# Altium PCB TopFinal.PcbDoc
Units mm, origin at the board's own origin, x right, y up, seen from the top; angles counter-clockwise.
Board outline 66.42 x 44.2 mm, 2 copper layers (Top Layer, Bottom Layer); 14 components, 10 nets, 55 pads, 3 vias.
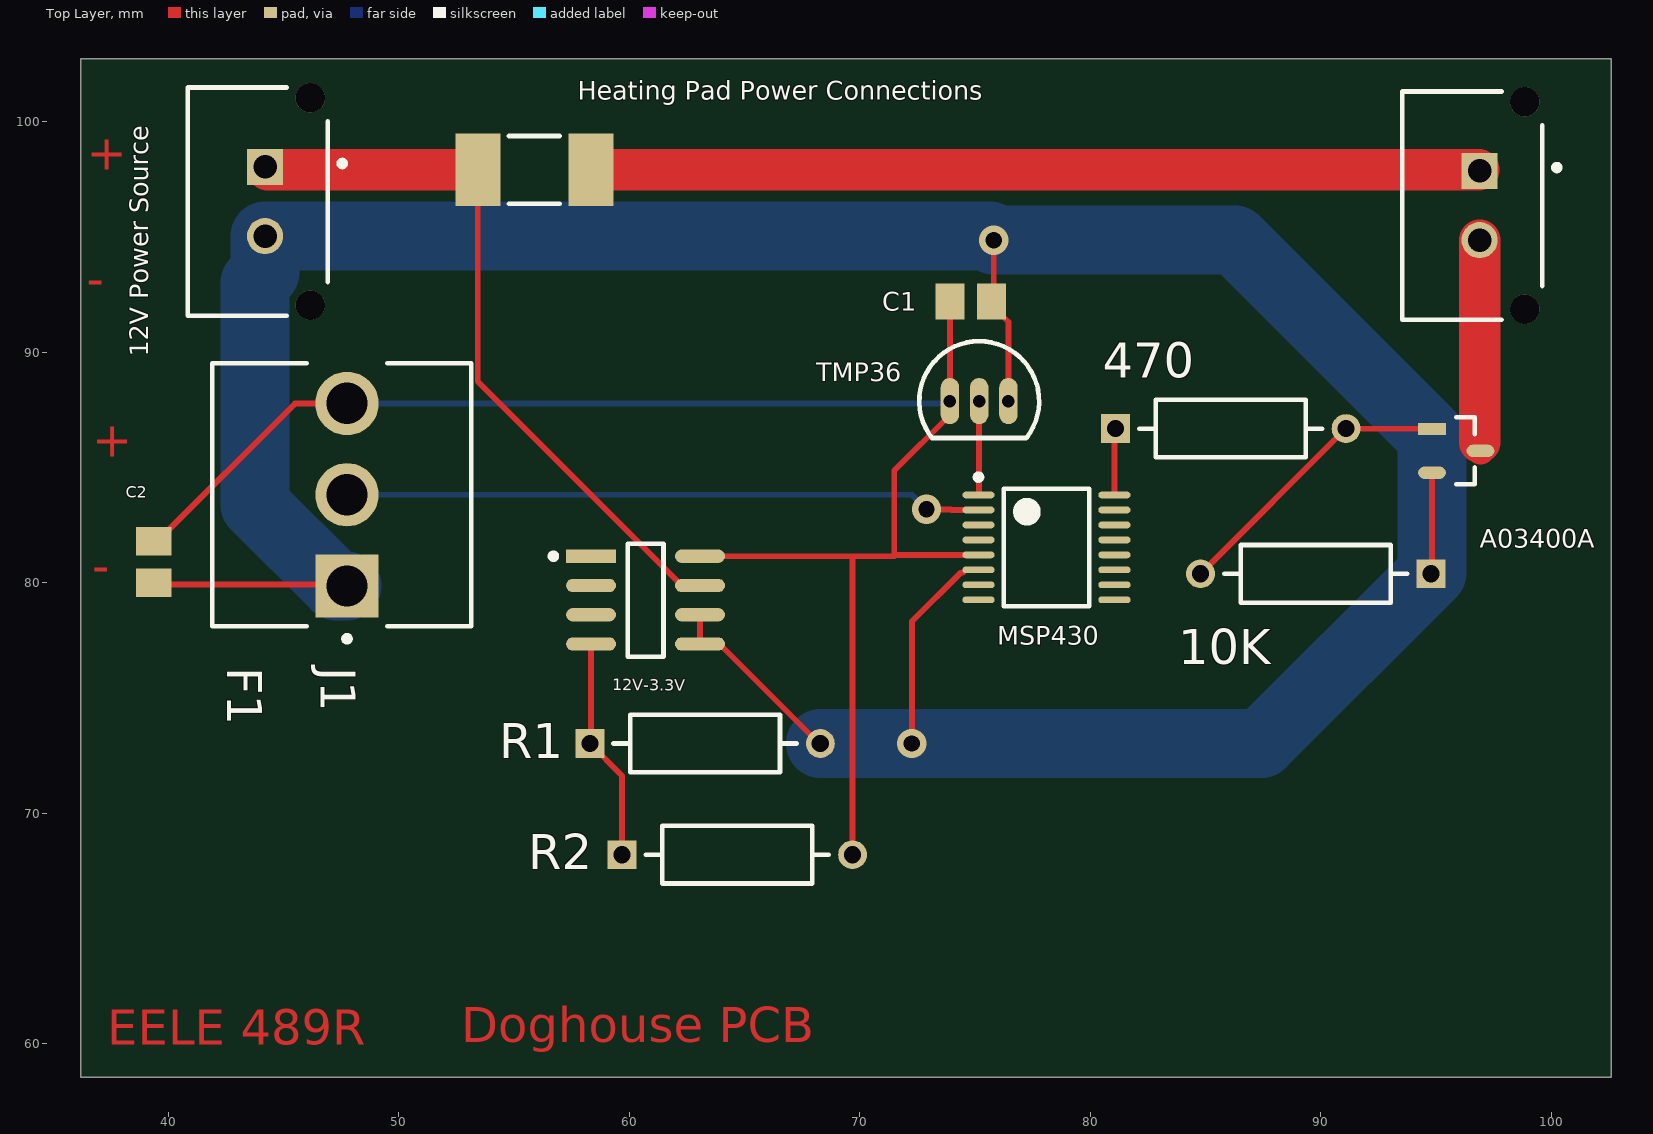
[diagram p0: Top Layer view]
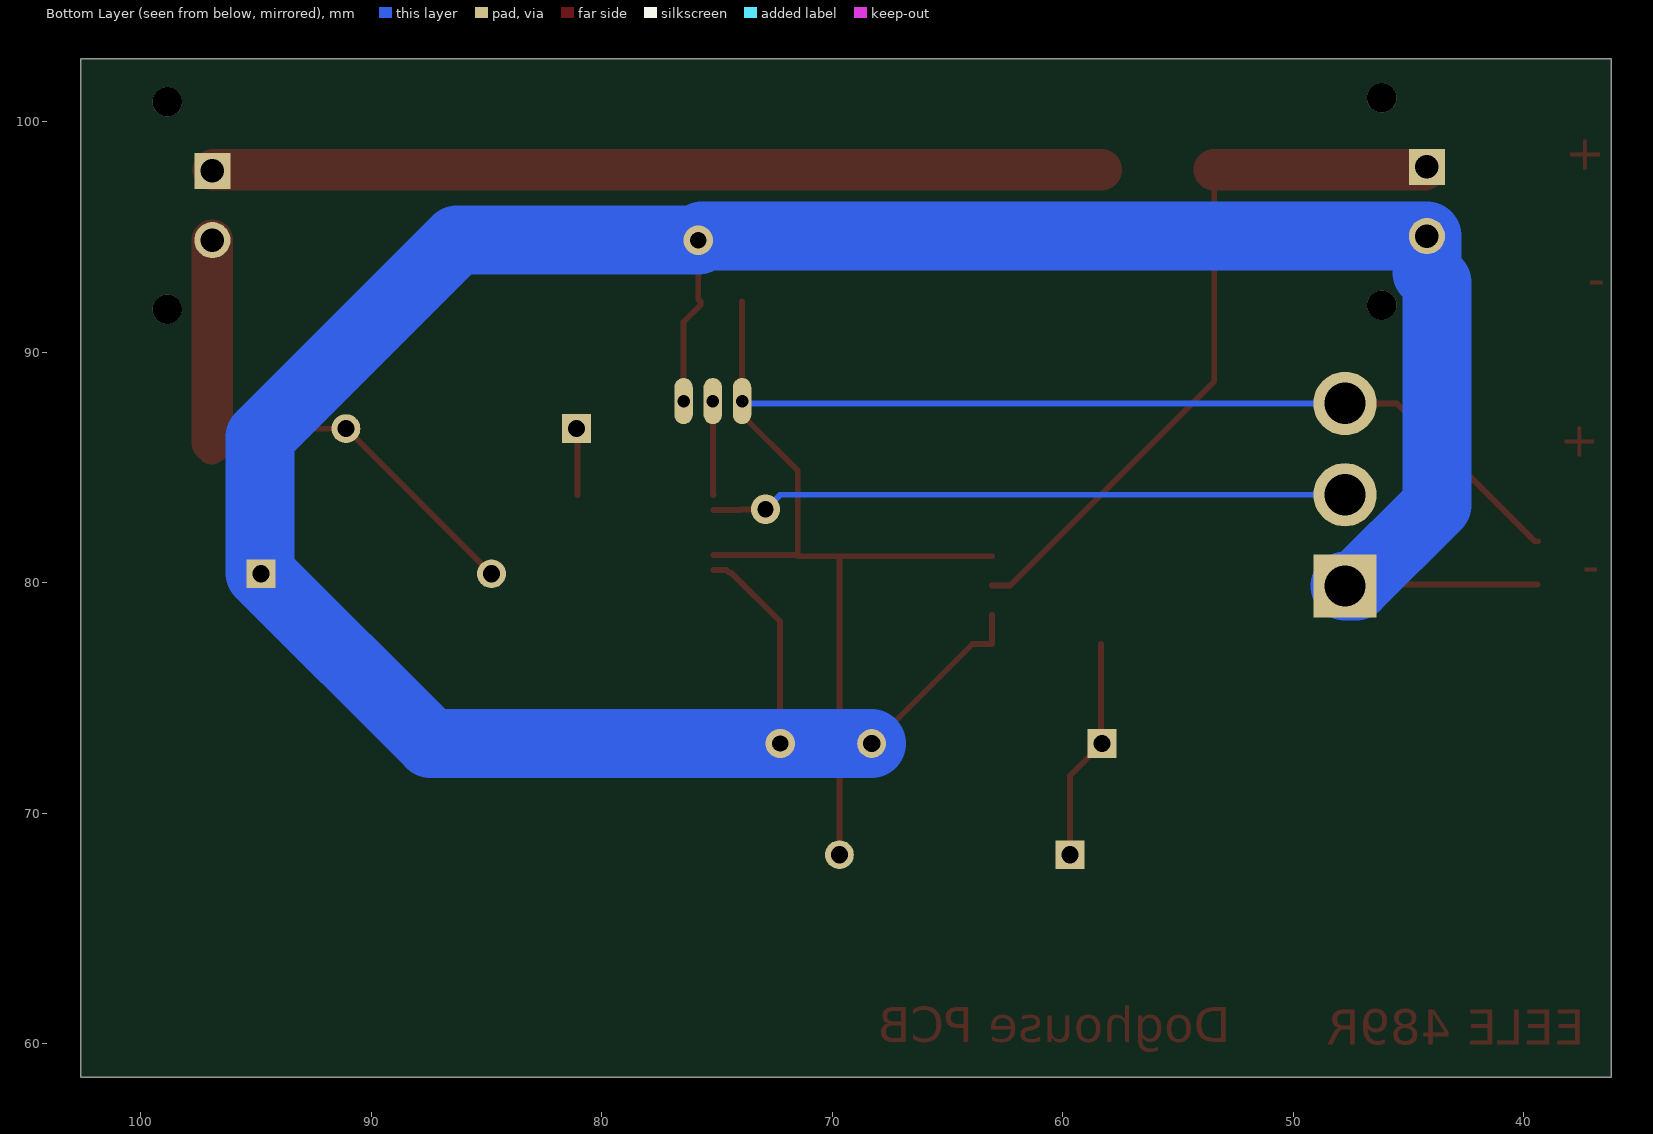
[diagram p1: Bottom Layer view, seen from below]
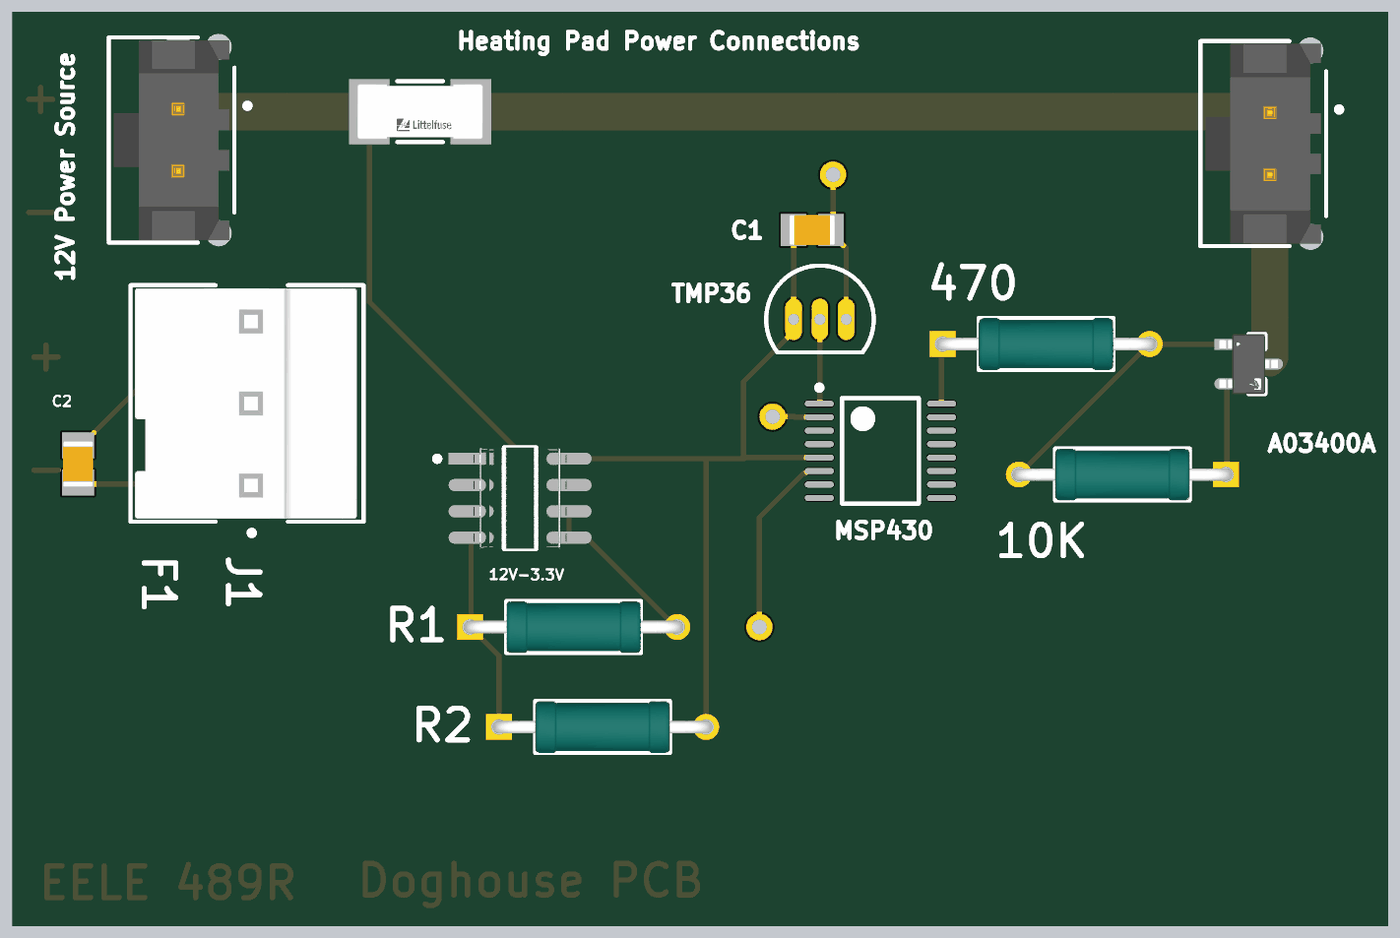
[diagram p2: 3D render of the assembled board from above, using the file's embedded part models]

## Layer stack, top to bottom
Top Solder: solder mask 0.0102, Solder Resist, Dk 3.5
Top Layer: signal copper 0.0356
Dielectric 1: dielectric 0.32, FR-4, Dk 4.8
Bottom Layer: signal copper 0.0356
Bottom Solder: solder mask 0.0102, Solder Resist, Dk 3.5

## Board outline
36.195,58.547 102.616,58.547 102.616,102.743 36.195,102.743

## Design rules (kind name [scope] priority, off if disabled: settings)
Clearance [All] p1: gap=0.254 ignorepadtopadclearanceinfootprint=FALSE
PolygonConnect [All] p1: connectstyle=Relief reliefconductorwidth=0.254 reliefentries=4 polygonreliefangle="90 Angle" airgapwidth=0.254
RoutingVias [All] p1: holewidth=0.711 width=1.27 viastyle="Through Hole" minholewidth=0.711 minwidth=1.27 maxholewidth=0.711 maxwidth=1.27
SolderMaskExpansion [All] p1: expansion=0.102 istentingtop=FALSE
SupplyNets "Schematic Supply Nets" [InNet('GND')] p1: voltage=0.000
Width [All] p1: maxlimit=10 minlimit=0.254 preferedwidth=0.254 minimp=50.000000 maximp=50.000000 favimp=50.000000
30 further rules are at their usual default settings.

## Classes and differential pairs
component class TopFinal: 10K "12V Power Source" 12V-3.3V A03400A C1 C2 F1 "Heating Pad Power Connections" J1 MSP430 TMP36

## Components (designator, comment, footprint, x,y, rotation, side; value= is the part's Value field where it differs from the comment)
10K "MRS25000C1000FRP00" FP-MRS25-MFG 89.789,80.391 r180 top (schematic designator R?)
"12V Power Source" "Molex 43650-0228" FP-436500228-MFG 43.881,96.544 r90 top
12V-3.3V "LM2594MX-3.3/NOPB" FP-D0008A-IPC_B 60.706,79.248 r0 top
470 "MRS25000C1000FRP00" FP-MRS25-MFG 86.104,86.692 r0 top (schematic designator R?)
A03400A "AO3400A" FP-SOT23-IPC_C 95.885,85.725 r0 top
C1 "Capacitor 1 uF +/- 10% 25 V 0805" CAPC2013X145X50ML20T25 74.814,92.202 r0 top value=.1µF
C2 "Capacitor 1 uF +/- 10% 25 V 0805" CAPC2013X145X50ML20T25 39.37,80.899 r270 top value=.1µF
F1 "0452004.MRL" FP-0452-MFG 55.88,97.917 r0 top value=0.0186Ω
"Heating Pad Power Connections" "Molex 43650-0228" FP-436500228-MFG 96.586,96.369 r90 top
J1 "09-65-2038" FP-09-65-2038-MFG 47.527,83.82 r270 top
MSP430 "MSP430FR2310 (Created)" "MSP430FR2310IPW16 (Created Footprint)" 78.105,81.534 r0 top
R1 "MRS25000C1000FRP00" FP-MRS25-MFG 63.293,73.025 r0 top (schematic designator R?)
R2 "MRS25000C1000FRP00" FP-MRS25-MFG 64.69,68.199 r0 top (schematic designator R?)
TMP36 "TMP36(correct)" ADI-T-3 75.184,87.884 r270 top

## Footprints (in the part's own frame and the unit in brackets; to place one, negate y for a bottom-side part, rotate by r counter-clockwise, add the part's x,y. Pads: shape width x height; smd on the part's side, far side on the other; paste and mask are expansions set on the pad)
ADI-T-3 [mm] "TO, Flat Index; 3 In-Line, Axial Leads; Body Dia. 5.1mm; Leads 0.48 x 0.48 mm (max)"
  oval 2x0.8 hole 0.54: 1(0,-1.27) 2(0,0) 3(0,1.27)
  silkscreen extent -2.6,-2.6 1.6,2.6, body extent -2.6,-2.61 1.6,2.61, height 5.33
CAPC2013X145X50ML20T25 [mm] "Chip Capacitor, 2-Leads, Body 2.2x1.45mm, IPC Low Density"
  rect 1.25x1.55 smd: 1(-0.9,0) 2(0.9,0)
  body extent -1.1,-0.72 1.1,0.73, height 1.45
FP-09-65-2038-MFG [mm]
  rect 2.75x2.75 hole 1.8 paste-2539.97 mask+0: 1(3.96,0.225)
  round 2.75 hole 1.8 paste-2539.97 mask+0: 2(0,0.225) 3(-3.96,0.225)
  silkscreen extent -5.71,-5.63 6.37,5.63, body extent -5.81,-5.72 5.81,5.72, height 0.25
FP-0452-MFG [mil]
  rect 77x124 smd paste+0 mask+0: 1(-96.5,0) 2(96.5,0)
  silkscreen extent -43,-58 43,58, body extent -139,-66 139,66, height 10
FP-436500228-MFG [mm]
  rect 1.57x1.57 hole 1.02 paste-2539.97 mask+0: 1(1.5,-0.315)
  round 1.57 hole 1.02 paste-2539.97 mask+0: 2(-1.5,-0.315)
  round 1.27 hole 1.27 unplated paste-2539.97 mask+0: ""(-4.5,-2.275) ""(4.5,-2.275)
  silkscreen extent -4.95,-3.79 4.95,3.04, body extent -5.24,-3.14 5.24,3.14, height 0.25
FP-D0008A-IPC_B [mm]
  rect 2.169x0.582 smd paste+0 mask+0: 1(-2.364,1.905)
  rrect100% 2.169x0.582 smd paste+0 mask+0: 2(-2.364,0.635) 3(-2.364,-0.635) 4(-2.364,-1.905) 5(2.364,-1.905) 6(2.364,-0.635) 7(2.364,0.635) 8(2.364,1.905)
  silkscreen extent -4.12,-2.45 0.78,2.45, body extent -3.7,-2.7 3.7,2.7, height 0.25
FP-MRS25-MFG [mm]
  rect 1.25x1.25 hole 0.75 paste-2539.97 mask+0: 1(-5,0)
  round 1.25 hole 0.75 paste-2539.97 mask+0: 2(5,0)
  silkscreen extent -3.98,-1.25 3.98,1.25, body extent -5.72,-1.35 5.72,1.35, height 0.25
FP-SOT23-IPC_C [mm]
  rect 1.205x0.532 smd paste+0 mask+0: 1(-1.05,0.95)
  rrect100% 1.205x0.532 smd paste+0 mask+0: 2(-1.05,-0.95) 3(1.05,0)
  silkscreen extent 0,-1.45 0.8,1.45, body extent -1.75,-1.55 1.75,1.55, height 0.25
"MSP430FR2310IPW16 (Created Footprint)" [mm] "Created MSP430FR2310IPW16"
  oval 1.4x0.29 smd mask+0.05: 1(-2.95,2.275) 2(-2.95,1.625) 3(-2.95,0.975) 4(-2.95,0.325) 5(-2.95,-0.325) 6(-2.95,-0.975) 7(-2.95,-1.625) 8(-2.95,-2.275) 9(2.95,-2.275) 10(2.95,-1.625) 11(2.95,-0.975) 12(2.95,-0.325) 13(2.95,0.325) 14(2.95,0.975) 15(2.95,1.625) 16(2.95,2.275)
  silkscreen extent -3.07,-2.55 1.85,3.17, body extent -2.54,-2.54 2.54,2.54, height 2.54

## Part data
10K 470 R1 R2: library part CMP-00030-42757237-1, "MRS25000C1000FRP00 Resistor, 100 Ohm, ± 1%, 600 mW, Axial Leaded, Metal Film (Thin Film), Professional", Case/Package=Axial, Max Operating Temperature=155°C, Max Power Dissipation=600mW, Min Operating Temperature=-55°C, Resistance=100Ω, Temperature Coefficient=50ppm/°C, Tolerance=1%, Voltage Rating=350V, Composition="Metal Film, Thin Film", Contact Plating=Tin, Diameter=2.5mm, Lead Diameter=600µm, Lead Free="Lead Free", Length=6.5mm, Military Standard=Not, Mount="Through Hole", NexarPartId=42757237, Number of Pins=2, Number of Terminations=2, Packaging="Tape & Reel (TR)", Power Rating=600mW, Radiation Hardening=No, REACH SVHC=Unknown, RoHS=Compliant, Schedule B="8533210090, 8533210090", Termination=Axial, Voltage Rating (DC)=350V, Width=2.5mm
"12V Power Source" "Heating Pad Power Connections": library part CMP-002-00071-1, "Rectangular Power Connector, 2 Contact(s), Female, Solder Terminal MOLEX", Max Operating Temperature=105°C, Min Operating Temperature=-40°C, Connector Type=Power,Rectangular, Mounting Technology=Board, RoHS Compliant=Yes
12V-3.3V: library part CMP-019-00049-1, "Switching Regulator, Voltage-mode, 1.4A, 173kHz Switching Freq-Max, BIPolar, PDSO8", Case/Package=SOP, Frequency=173kHz, Max Operating Temperature=125°C, Max Output current=1.4A, Max Supply Voltage=40V, Min Input Voltage=4.5V, Min Operating Temperature=-40°C, Nominal Output Voltage=3.3V, Nominal Supply Voltage=12V, Package Body Material=Plastic, Package Equivalence Code=SOP8,.25, Package Shape=Rectangular, Package Style="SMALL OUTLINEMeter", Peak Reflow Temperature (Cel)=260°C, Temperature Grade=AUTOMOTIVE, Time @ Peak Reflow Temperature-Max (s)=40s, Channels=1, Control Mode=VOLTAGE-MODE, Control Technique="PULSE WIDTH MODULATION", Height - Seated (Max)=1.75mm, JESD-30 Code=R-PDSO-G8, JESD-609 Code=e3, Length=4.9mm, Moisture Sensitivity Level=1, Pins=8, Qualification Status="Not Qualified", Reach SVHC Compliant=Yes, RoHS Compliant=Yes, Surface Mount=Yes, Switcher Configuration=BUCK, Technology=BIPOLAR, Terminal Finish=Tin, Terminal Form="Gull Wing", Terminal Pitch=1.27mm, Terminal Position=DUAL, Throw Configuration="SWITCHING REGULATOR", Width=3.9mm
A03400A: library part CMP-013-00034-2, "Small Signal Field-Effect Transistor, 5.7A I(D), 30V, 1-Element, N-Channel, Silicon, Metal-oxide Semiconductor FET", Pins=3, RoHS Compliant=Yes
C1 C2: library part CMP-001-00010-7, "Chip Capacitor, 1 uF, +/-10%, 25 V, 0805 (2012 Metric)", Capacitor Type=Ceramic, Case/Package=0805, Max Operating Temperature=125°C, Min Operating Temperature=-55°C, Tolerance=10%, Voltage Rating=25V, Mounting Technology=SM, Pins=2, RoHS Compliant=True
F1: library part CMP-08605-000077-1, "FUSE BRD MNT 4A 125VAC/VDC 2SMD", Fuse Current=4A, Fuse Interrupt Ac Current=50A, Fuse Interrupt Dc Current=300A, Manufacturer="Littelfuse Inc", Max Fuse Ac Voltage=125V, Package=0452, Resistance=0.0186Ω, Temperature="-55°C to +125°C", Temperature Range High=+125°C, Temperature Range Low=-55°C, Automotive=No, Category=Fuse, ComponentLink2Description=Datasheet, ComponentLink2URL=https://www.littelfuse.com/~/media/electronics/datasheets/fuses/littelfuse_fuse_452_454_datasheet.pdf.pdf, Device Class L1="Circuit Protection", Device Class L2=Fuses, Device Class L3=unset, Digikey Description="FUSE BRD MNT 4A 125VAC/VDC 2SMD", Fuse Blow Speed=Slow, Fuse I2T=34.4A2Sec, Height=2.94mm, Lead Free=Yes, Manufacturer Part Number=0452004.MRL, Max Fuse Dc Voltage=125V, Mouser Description="Surface Mount Fuses 125V 4A", Octopart=https://octopart.com/0452004.mrl-littelfuse-566421, RoHS=TRUE, Voltage Rating=125V
J1: library part CMP-04776-000251-1, "CONN HEADER VERT 3POS 3.96MM", Color=Natural, Contact Resistance=10mR, Current Rating=7A, Flammability Rating="UL94 V-2", Max Operating Temperature=105°C, Max Voltage Rating (AC)=250V, Min Operating Temperature=-40°C, Package Quantity=8000, Contact Gender=Male, Contact Material=Brass, Contact Plating=Tin, Gender=Male, Glow Wire Compliant=Non-compliant, Halogen Free="Halogen Free", Housing Color=Natural, Housing Material=Nylon, Lead Free="Lead Free", Mating Cycles=30, Mount="Through Hole", Number of Contacts=3, Number of Positions=3, Number of Rows=1, Orientation=Straight, Packaging=Bulk, Pitch=3.96mm, Radiation Hardening=No, RoHS Compliant=Yes, Series=5273, Termination="Through Hole", Voltage Rating=250V, Voltage Rating (DC)=250V
MSP430: library part CMP-020-00023-4, "RISC Microcontroller, 16-Bit, FRAM, MSP430 CPU, 16MHz, CMOS, PDSO16", Case/Package=TSSOP, Clock Frequency=16MHz, Max Operating Temperature=85°C, Max Supply Voltage=3.6V, Min Operating Temperature=-40°C, Min Supply Voltage=1.8V, Nominal Supply Voltage=2.2V, Package Body Material=Plastic, Package Shape=Rectangular, Temperature Grade=INDUSTRIAL, Height - Seated (Max)=1.2mm, Interface=I2C,SPI,IrDA,UART, JESD-30 Code=R-PDSO-G16, JESD-609 Code=e4, Length=5mm, Moisture Sensitivity Level=2, Number of I/O Lines=11, Peripherals=PWM, Pins=16, Reach SVHC Compliant=Yes, RoHS Compliant=Yes, Surface Mount=Yes, Technology=CMOS, Terminal Finish=Nickel, Terminal Form="Gull Wing", Terminal Pitch=0.65mm, Terminal Position=DUAL, Width=4.4mm
TMP36: library part CMP-010-00026-3, "Analog Voltage Output Sensor, 0.1V Min, 2V Max, 4Cel, Rectangular, 3 Pin, Through Hole Mount", Max Operating Temperature=125°C, Max Supply Voltage=5.5V, Min Operating Temperature=-55°C, Min Supply Voltage=2.7V, Mounting Technology="Through Hole", Pins=3, RoHS Compliant=Yes, Sensor Type="TEMPERATURE SENSOR,ANALOG,VOLTAGE OUTPUT"

## Via types
v1: diameter 1.27, hole 0.711, Top Layer to Bottom Layer, 3 vias

## Nets (pads, with @x,y where several pads share a name; then routed paths per layer and width w, separated by ;. In a path a pad name is that pad's centre, name@x,y a point inside that pad or via, vN(x,y) a via of type N, cw(c..) or ccw(c..) an arc to the next point about the centre after c; other vN are vias at no path point)
GND: 10K.1 12V-3.3V.5 12V-3.3V.6 "12V Power Source.2" A03400A.2 C1.2 C2.2 J1.1 MSP430.6 R1.2 TMP36.3 | length 144.5
  Top Layer w0.254: C2.2@39.395,79.93 J1.1@47.682,79.93 ; 12V-3.3V.6 12V-3.3V.5 63.919,77.343 68.237,73.025 R1.2 ; v1(72.263,73.025) 72.263,78.316 74.382,80.435 74.466,80.435 74.59,80.559 MSP430.6 ; v1(75.819,94.869) 75.819,92.307 C1.2 75.714,92.052 76.454,91.312 TMP36.3 ; 10K.1 94.835,80.437 A03400A.2
  Bottom Layer w3: J1.1 47.287,79.86 43.767,83.38 43.767,93.034 44.196,93.463 44.196,95.044 75.644,95.044 v1(75.819,94.869) 86.291,94.869 94.835,86.326 94.835,80.437 10K.1 87.423,73.025 v1(72.263,73.025) R1.2
"Net12V Power Source_1": 12V-3.3V.7 "12V Power Source.1" F1.1 | length 31.8
  Top Layer w0.254: 44.196,98.044 44.323,97.917 ; F1.1 53.429,88.73 62.276,79.883 12V-3.3V.7
  Top Layer w1.8: 44.323,97.917 F1.1
Net12V-3.3V_4: 12V-3.3V.4 R1.1 R2.1 | length 9.8
  Top Layer w0.254: 12V-3.3V.4 58.342,73.074 R1.1 59.69,71.628 R2.1 R2.1@59.659,68.23
Net12V-3.3V_8: 12V-3.3V.8 C1.1 C2.1 J1.3 MSP430.5 R2.2 TMP36.1 | length 74.1
  Top Layer w0.254: C2.1 39.52,81.799 45.501,87.78 J1.3 ; 12V-3.3V.8 69.596,81.153 ; R2.2 69.69,81.059 69.596,81.153 ; 71.526,81.209 MSP430.5 ; TMP36.1@73.81,87.78 TMP36.1 ; TMP36.1@73.914,87.78 73.914,87.284 71.501,84.871 71.501,81.153 69.596,81.153 ; TMP36.1@73.914,88.011 C1.1 C1.1@73.925,92.191
  Bottom Layer w0.254: J1.3 73.81,87.78 TMP36.1
NetA03400A_1: 10K.2 470.2 A03400A.1 | length 12.7
  Top Layer w0.254: 10K.2 84.796,80.391 91.097,86.692 470.2 91.113,86.683 94.826,86.683 A03400A.1
NetA03400A_3: "Heating Pad Power Connections.2" A03400A.3 | length 9.2
  Top Layer w1.2: 96.901,86.091 96.935,86.056 A03400A.3
  Top Layer w1.8: 96.901,86.091 96.901,94.869
NetF1_2: "Heating Pad Power Connections.1" F1.2 | length 38.7
  Top Layer w1.5: 96.822,97.79 96.901,97.869 96.853,97.917
  Top Layer w1.8: F1.2 96.853,97.917
NetJ1_2: J1.2 MSP430.2 | length 27.7
  Top Layer w0.254: v1(72.898,83.185) 73.966,83.185 73.992,83.159 MSP430.2 MSP430.2@75.148,83.166
  Bottom Layer w0.254: J1.2 72.263,83.82 v1(72.898,83.185)
NetMSP430_1: MSP430.1 TMP36.2 | length 4.1
  Top Layer w0.254: MSP430.1 75.167,83.809 75.184,83.826 TMP36.2
NetMSP430_16: 470.1 MSP430.16 | length 3.2
  Top Layer w0.254: 470.1@80.966,86.554 470.1 ; 470.1@81.006,86.594 470.1 ; MSP430.16 81.055,86.643 470.1 ; 470.1@81.1,86.688 470.1
pads on no net: 12V-3.3V.1 12V-3.3V.2 12V-3.3V.3 "12V Power Source." "Heating Pad Power Connections." MSP430.3 MSP430.4 MSP430.7 MSP430.8 MSP430.9 MSP430.10 MSP430.11 MSP430.12 MSP430.13 MSP430.14 MSP430.15

## Other copper
Top Layer:
  text "+" at 36.449,97.917 h1.52
  text "-" at 36.449,92.456 h1.52
  text "+" at 36.703,85.471 h1.52
  text "-" at 36.703,80.01 h1.52
  text "Doghouse PCB" at 52.705,60.071 h1.52
  text "EELE 489R" at 37.338,59.944 h1.52